# EAGLE board GarageMote (EAGLE 6.5.0)
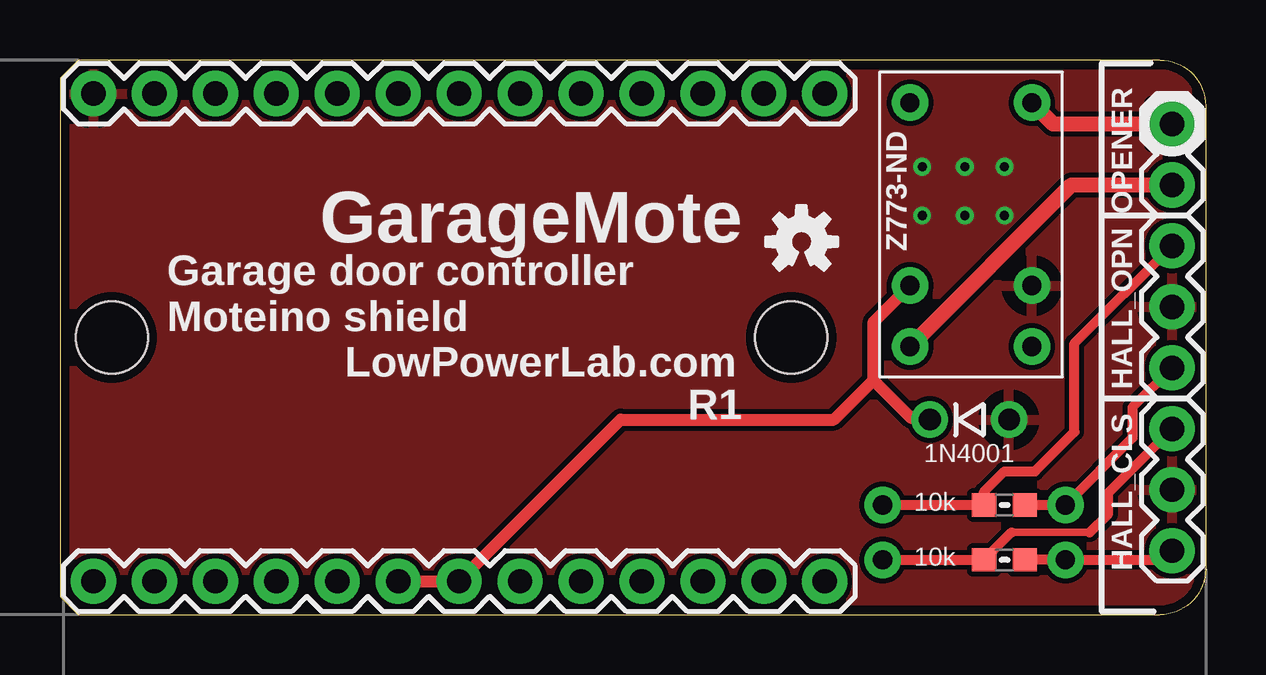
[diagram p0: board, top side]
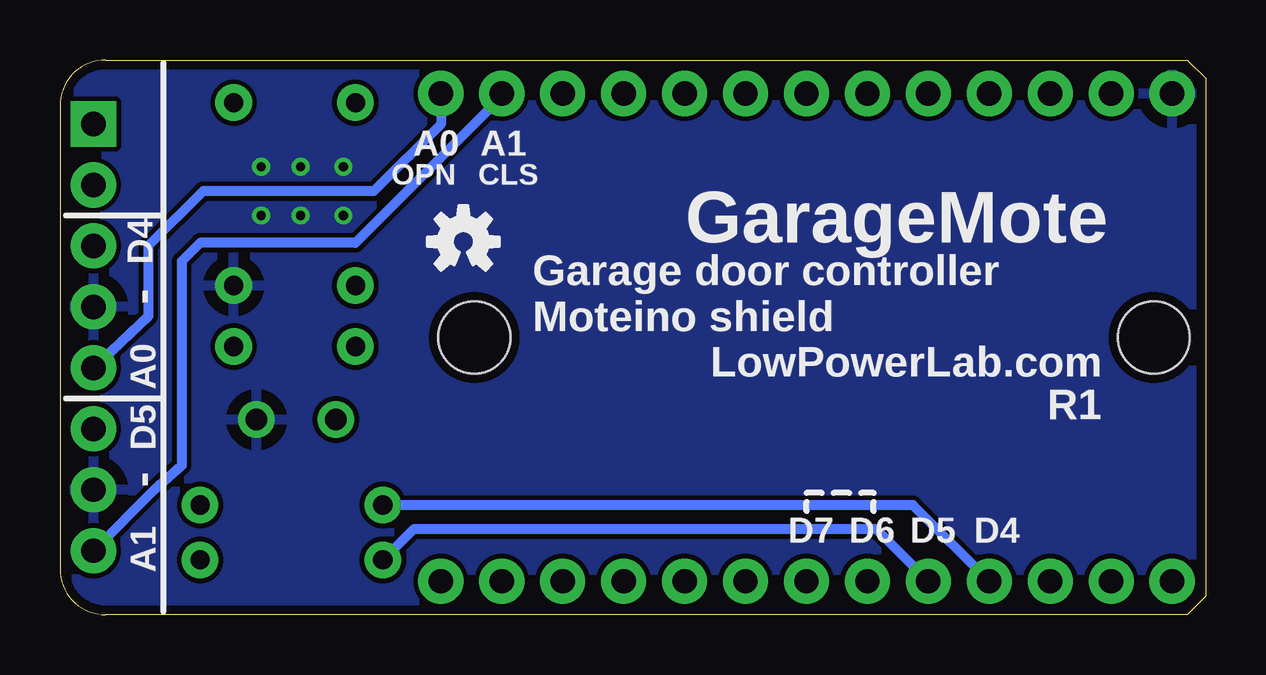
[diagram p1: board, bottom side, seen from below]

Size 47.75 x 23.11 mm. Coordinates in mm from the lower left corner, seen from the top.
Outline: 47.75,1.91 arc-90 45.85,0 0.76,0 0,0.76 0,22.35 0.76,23.11 45.85,23.11 arc-90 47.75,21.21 47.75,1.91
Copper layers (1*16): Top 0.0356mm / dielectric 1.5011mm / Bottom 0.0356mm
Design rules "RaspiONOFF *": minimum track width 6mil, minimum drill 13mil, track to track 8mil, track to pad 8mil, pad to pad 6mil, via to via 6mil, smd to smd 6mil, copper to edge 15mil, drill to drill 6mil, minimum pad ring 7mil, minimum via ring 7mil, stop-mask expansion 4mil, vias tented up to drill 28mil, thermal gap 20mil
Holes 3 mm at 2.16,11.56 30.48,11.56

## Footprints (pad centres in the part's own frame; a part is rotated, then mirrored left to right if it is on the bottom)
DIODE_UPRIGHT = drill 0.9 pad 1.524: ANODE_PLUS 1.714,0; CATHODE_MINUS -1.587,0
1X13 = drill 1.016 pad 1.88: 1 0,0; 2 2.54,0; 3 5.08,0; 4 7.62,0; 5 10.16,0; 6 12.7,0; 7 15.24,0; 8 17.78,0; 9 20.32,0; 10 22.86,0; 11 25.4,0; 12 27.94,0; 13 30.48,0
1X08 = drill 1.016 pad 1.88 square: 1 0,0 | drill 1.016 pad 1.88: 2 2.54,0; 3 5.08,0; 4 7.62,0; 5 10.16,0; 6 12.7,0; 7 15.24,0; 8 17.78,0
JRC-23F = drill 0.8 pad 1.524: COIL1 -2.54,2.54; COIL2 -2.54,-2.54; COM1 5.08,2.54; COM2 5.08,-2.54; SW1 -5.08,2.54; SW2 -5.08,-2.54
0603-RES = smd 1.016 x 0.965: 1 -0.85,0; 2 0.85,0
AXIAL-1/4W = drill 0.8 pad 1.524: P$1 -3.81,0; P$2 3.81,0

## Placement (x,y rotation side)
1N4001  DIODEUPRIGHT  [DIODE_UPRIGHT]  37.85,8.13 0 top
JP1  M13  [1X13]  1.4,21.72 0 top
JP2  M13  [1X13]  31.88,1.4 180 top
JP3  [1X08]  46.35,20.45 270 top
JRC-2F  JRC-23F  [JRC-23F]  37.97,16.26 90 top
R1  10k  [0603-RES]  39.37,4.57 180 top
R2  10k  [0603-RES]  39.37,2.29 180 top
R3  [AXIAL-1/4W]  38.1,4.57 180 top
R4  [AXIAL-1/4W]  38.1,2.29 180 top
U$1  [OSHW-LOGO-S]  30.94,15.54 0 bottom
U$2  [OSHW-LOGO-S]  30.91,15.54 0 top

## Library data of the parts
1N4001 JRC-2F R1-R4 = LowPowerLab
JP1-JP3 = SparkFun-Connectors
U$1 U$2 = SparkFun-Aesthetics

## Nets
5V: JP1.2
A0: JP1.13 JP3.5 R1.1 R3.P$1
A1: JP1.12 JP3.8 R2.1 R4.P$1
D4: JP2.10 JP3.3 R1.2 R3.P$2
D5: JP2.9 JP3.6 R2.2 R4.P$2
D6: 1N4001.CATHODE_MINUS JP2.7 JP2.8 JRC-2F.COIL1
GND: 1N4001.ANODE_PLUS JP1.1 JP3.4 JP3.7 JRC-2F.COIL2
RELAYIN: JP3.1 JRC-2F.COM2
RELAYOUT: JP3.2 JRC-2F.SW1

## Tracks (layer width: path | path; a pad name or v marks a point on that pad's centre or on a via)
A0
  Top 0.406: R1.1 R3.P$1 44.7,7.37 44.7,8.64 JP3.5
  Bottom 0.406: JP1.13 31.88,20.45 34.67,17.65 41.78,17.65 44.07,15.37 44.07,12.45 JP3.5
A1
  Top 0.406: JP3.8 45.97,2.29 R4.P$1 R2.1
  Bottom 0.406: JP1.12 29.34,21.59 35.43,15.49 41.91,15.49 42.67,14.73 42.67,6.22 43.81,5.21 JP3.8
D4
  Top 0.406: R3.P$2 R1.2 38.52,5.12 39.37,5.97 40.64,5.97 42.29,7.62 42.29,11.3 JP3.3
  Bottom 0.406: JP2.10 12.19,4.57 R3.P$2
D5
  Top 0.305: 39.66,3.43 42.93,3.43
  Top 0.406: R4.P$2 R2.2 39.66,3.43 | 42.93,3.43 43.69,4.19 43.69,5.08 JP3.6
  Bottom 0.406: R4.P$2 33.02,3.56 13.72,3.56 JP2.9
D6
  Top 0.508: 1N4001.CATHODE_MINUS 36.26,8.19 35.5,8.19 33.91,9.78 | 33.91,9.78 33.91,12.19 JRC-2F.COIL1 | 33.91,9.78 32.26,8.13 23.37,8.13 JP2.7 JP2.8
GND  (via drill 0.38)
  other vias: 35.94,16.64 37.72,16.64 39.37,16.64 35.94,18.67 37.72,18.67 39.37,18.67
  pour Top: 0.25,22.99 47.5,22.99 47.37,0.13 0.25,0.13
  pour Bottom: 0.25,22.99 47.5,22.99 47.37,0.13 0.25,0.13
RELAYIN
  Top 0.635: JP3.1 41.4,20.45 JRC-2F.COM2
RELAYOUT
  Top 0.635: JRC-2F.SW1 42.16,17.91 JP3.2

## Text on the board
tPlace: OPENER | GarageMote | Z773-ND | HALL_OPN | Garage door controller / Moteino shield | LowPowerLab.com | R1 | HALL_CLS
bPlace: A1 | A0 | CLS | OPN | GarageMote | D4 | Garage door controller / Moteino shield | - | LowPowerLab.com | A0 | R1 | D5 | - | D4 | D5 | D6 | D7 | A1